# Altium PCB lesson10.PcbDoc
Units mil, origin at the board's own origin, x right, y up, seen from the top; angles counter-clockwise.
Board outline 4920 x 3340 mil, 2 copper layers (Top Layer, Bottom Layer); 11 components, 16 nets, 68 pads, 8 vias.
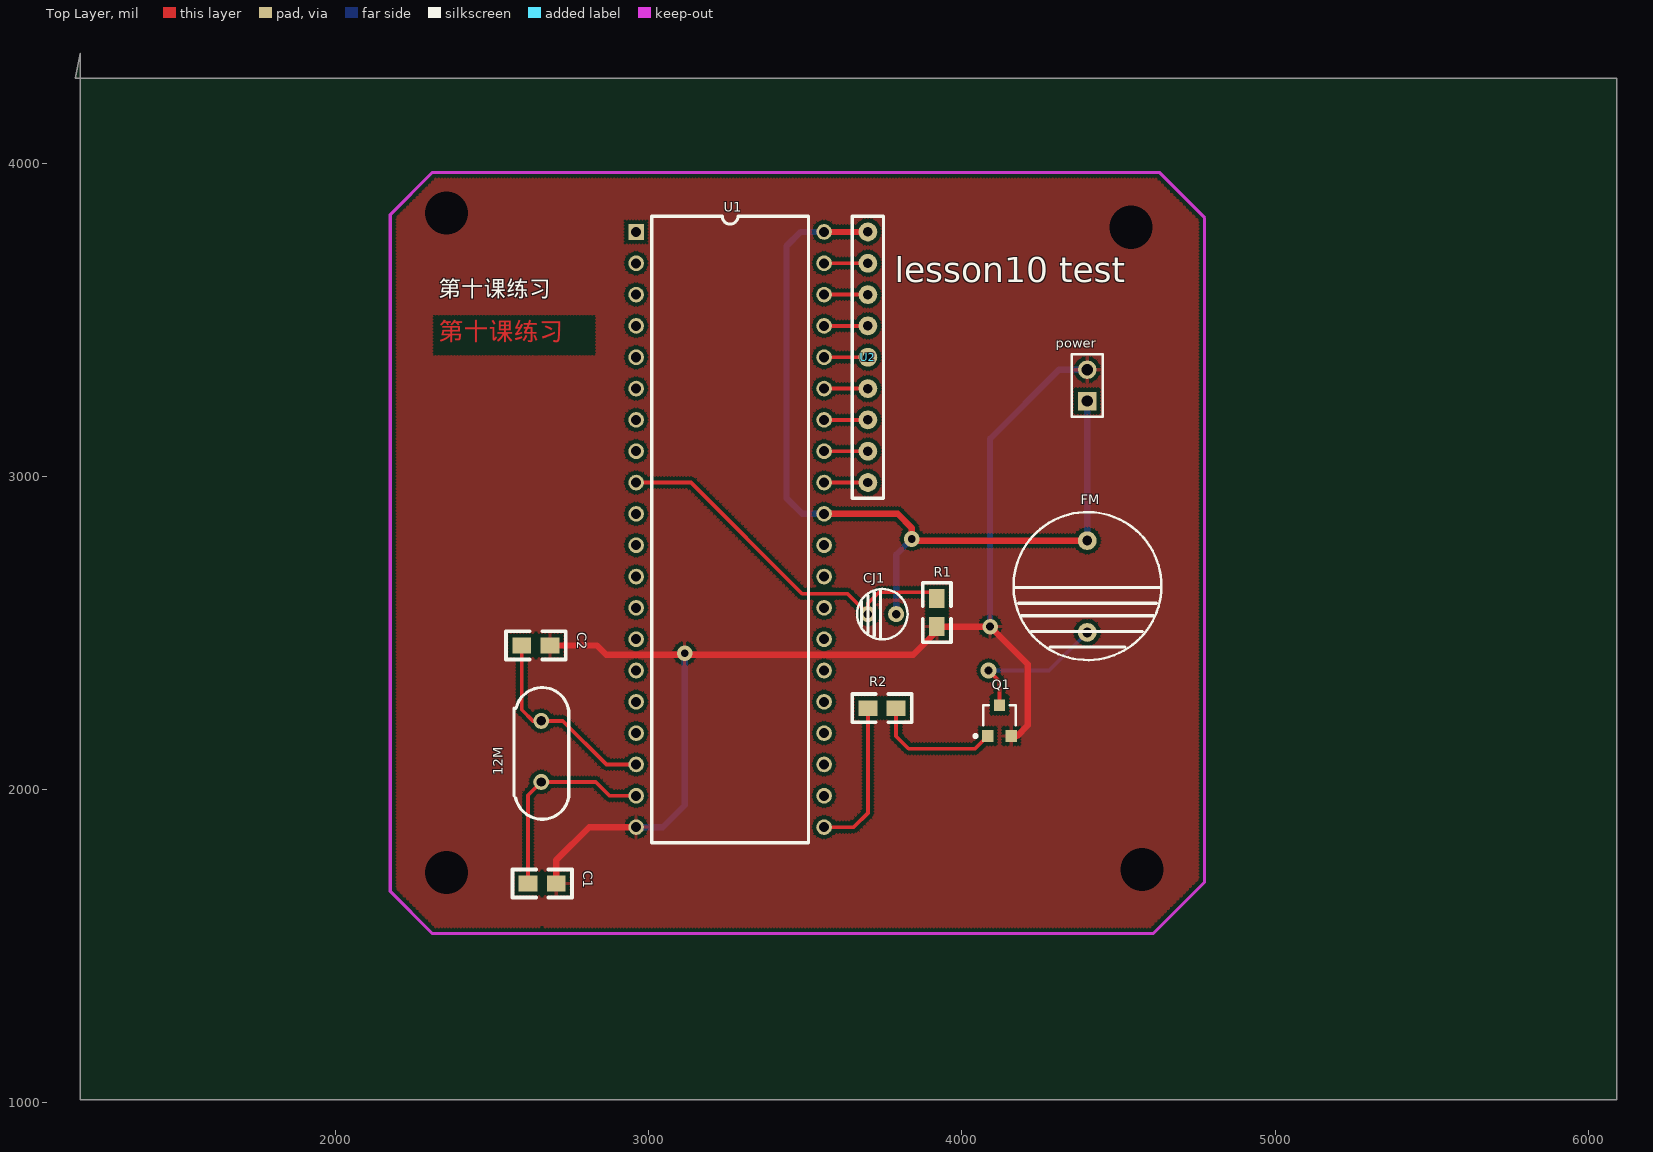
[diagram p0: Top Layer view]
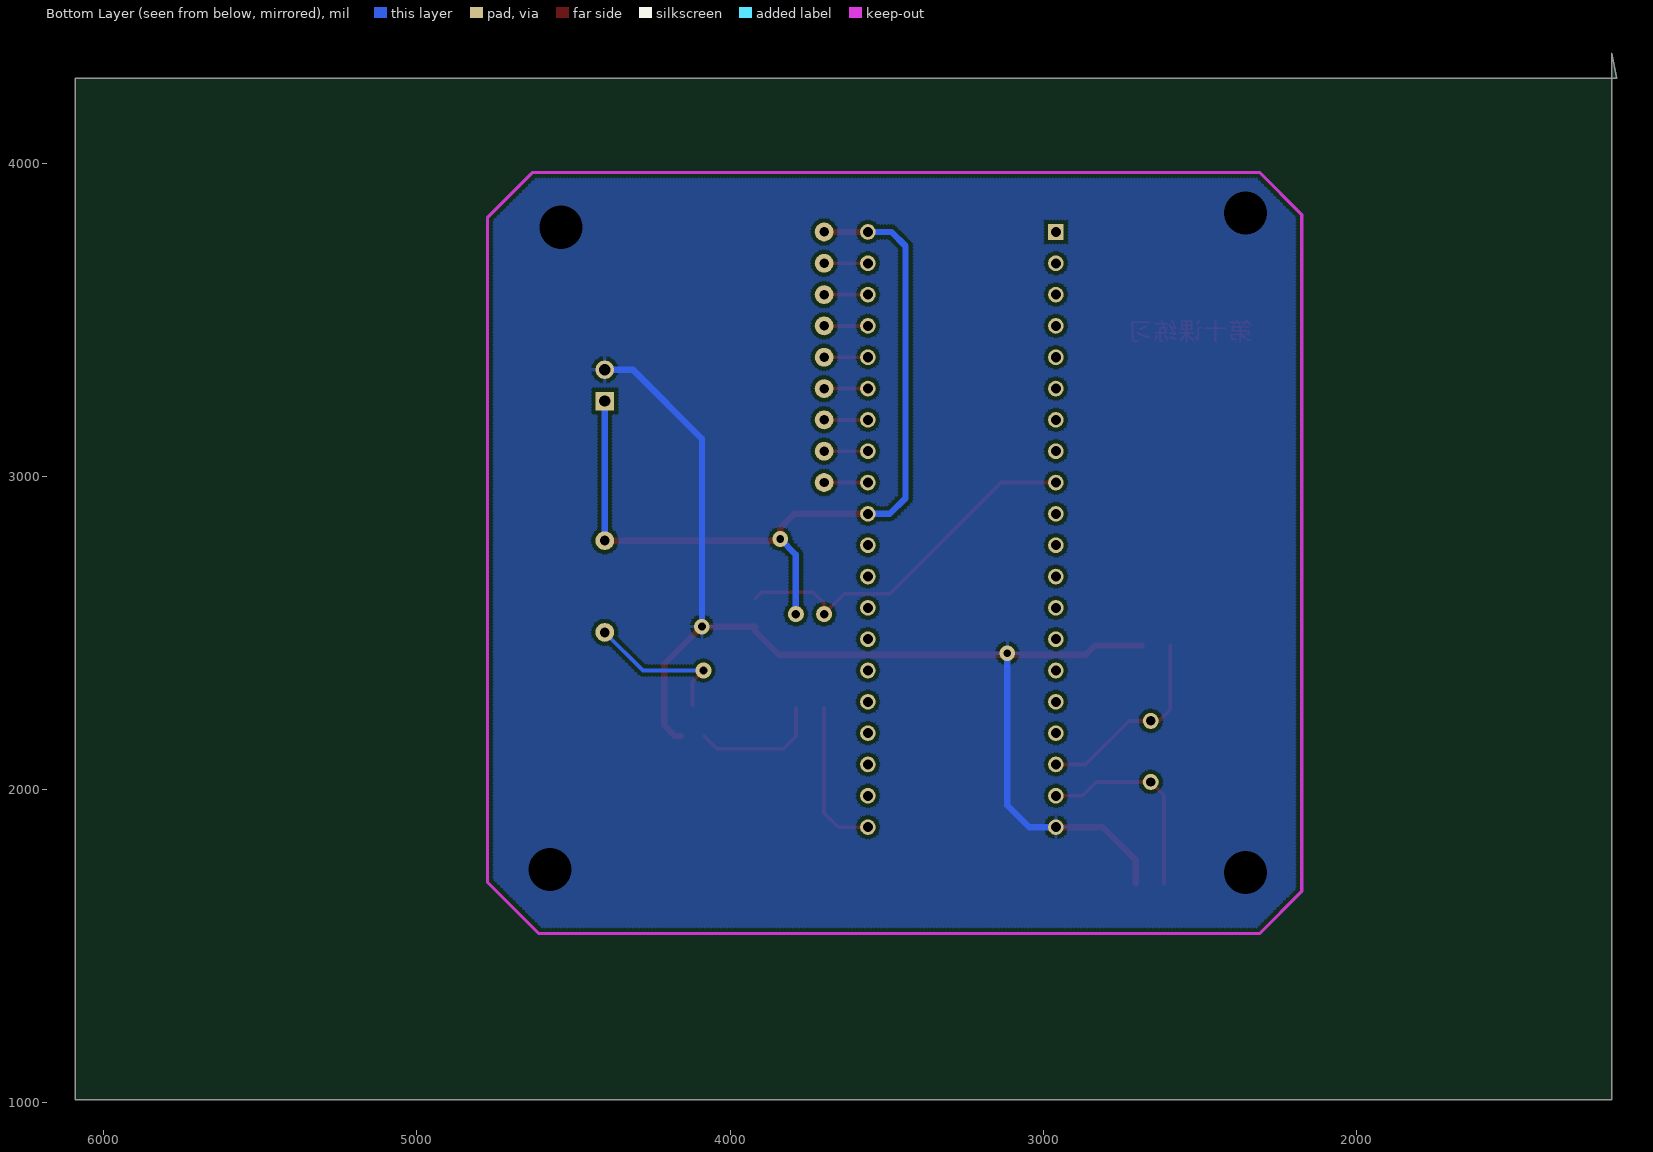
[diagram p1: Bottom Layer view, seen from below]

## Layer stack, top to bottom
Top Layer: signal copper 1.4
Dielectric: dielectric 12.6, FR-4, Dk 4.8
Bottom Layer: signal copper 1.4

## Board outline
1185,4350 1185,1010 6090,1010 6090,4270 1170,4270

## Design rules (kind name [scope] priority, off if disabled: settings)
Clearance [All] p1: gap=12
ComponentClearance [All] p1: gap=10 collisioncheckmode=3 verticalgap=10
PolygonConnect [All] p1: connectstyle=Relief reliefconductorwidth=10 reliefentries=4 polygonreliefangle="90 Angle"
RoutingVias [All] p1: holewidth=25 width=50 viastyle="Through Hole" minholewidth=25 minwidth=50 maxholewidth=25 maxwidth=50
SolderMaskExpansion [All] p1: expansion=4
TestPointUsage [All] p1: valid=0 allowmultiple=FALSE
Testpoint [All] p1: side=15 testpointundercomponent=TRUE minsize=40 maxsize=100 preferedsize=60 minholesize=0 maxholesize=40 preferedholesize=32 testpointgrid=1 style=1023 order=0123456789
Width Width_gnd [InNet('GND')] p1: maxlimit=20 minlimit=20 preferedwidth=20
Width Width_vcc [InNet('VCC')] p2: maxlimit=20 minlimit=20 preferedwidth=20
Width [All] p3: maxlimit=12 minlimit=12 preferedwidth=12
18 further rules are at their usual default settings.

## Components (designator, comment, footprint, x,y, rotation, side; value= is the part's Value field where it differs from the comment)
12M "12MHZ" JZ 2655,2120 r270 top (schematic designator U3)
C1 "30P" 0805 2615,1700 r0 top
C2 "30P" 0805 2595,2460 r0 top
CJ1 "10UF" CD4 3740,2560 r0 top
FM "BUZZER" LB2 4400,2700 r0 top
power "P2" HDR1X2 4400,3240 r90 top
Q1 "PNP" SOT-23 4120,2220 r0 top
R1 "1K" 0805 3920,2520 r90 top
R2 "1K" 0805 3700,2260 r0 top
U1 "87C51" DIP40 2960,3780 r0 top
U2 "SHANGLA" SHANGLA 3700,3780 r270 top

## Footprints (in the part's own frame and the unit in brackets; to place one, negate y for a bottom-side part, rotate by r counter-clockwise, add the part's x,y. Pads: shape width x height; smd on the part's side, far side on the other; paste and mask are expansions set on the pad)
0805 [mil]
  rect 60x50 smd: 1(0,0) 2(90,0)
  silkscreen extent -50,-45 140,45
CD4 [mm]
  round 1.3 hole 0.7: 1(1.27,0) 2(-1.016,0)
  silkscreen extent -1.89,-2.04 2.19,2.04
DIP40 [mil]
  rect 50x50 hole 32: 1(0,0)
  round 50 hole 32: 2(0,-100) 3(0,-200) 4(0,-300) 5(0,-400) 6(0,-500) 7(0,-600) 8(0,-700) 9(0,-800) 10(0,-900) 11(0,-1000) 12(0,-1100) 13(0,-1200) 14(0,-1300) 15(0,-1400) 16(0,-1500) 17(0,-1600) 18(0,-1700) 19(0,-1800) 20(0,-1900) 21(600,-1900) 22(600,-1800) 23(600,-1700) 24(600,-1600) 25(600,-1500) 26(600,-1400) 27(600,-1300) 28(600,-1200) 29(600,-1100) 30(600,-1000) 31(600,-900) 32(600,-800) 33(600,-700) 34(600,-600) 35(600,-500) 36(600,-400) 37(600,-300) 38(600,-200) 39(600,-100) 40(600,0)
  silkscreen extent 50,-1950 550,50
HDR1X2 [mm]
  rect 1.5x1.5 hole 0.9: 1(0,0)
  round 1.5 hole 0.9: 2(2.54,0)
  silkscreen extent -1.27,-1.27 3.81,1.27
JZ [mm]
  round 1.3 hole 0.762: 1(-2.517,0.055) 2(2.436,0.055)
  silkscreen extent -5.22,-2.16 5.46,2.31
LB2 [mil]
  round 60 hole 31.5: 1(0,94.49) 2(0,-198.42)
  silkscreen extent -235,-287 237,186
SHANGLA [mil]
  round 60 hole 30: 1(0,0) 2(100,0) 3(200,0) 4(300,0) 5(400,0) 6(500,0) 7(600,0) 8(700,0) 9(800,0)
  silkscreen extent -50,-50 850,50
SOT-23 [mm] "SOT-23; 3 Leads; Body 3.0 x 2.6 mm, inc. leads (LxW max)"
  rect 0.9x0.95 smd: 1(-0.95,-1.25) 2(0.95,-1.25) 3(0,1.25)
  silkscreen extent -2.07,-1.37 1.3,1.25

## Part data
12M: library part CRYSTAL, "Crystal"
C1 C2: library part CAP, "Capacitor"
CJ1: library part "CAPACITOR POL", "Capacitor"
FM: "Buzzer"
power: library part "HEADER 2"
Q1: "PNP Transistor"
R1 R2: library part RES2

## Via types
v1: diameter 50, hole 25, Top Layer to Bottom Layer, 4 vias
v2: diameter 30, hole 137.8, Top Layer to Bottom Layer, 4 vias

## Nets (pads, with @x,y where several pads share a name; then routed paths per layer and width w, separated by ;. In a path a pad name is that pad's centre, name@x,y a point inside that pad or via, vN(x,y) a via of type N, cw(c..) or ccw(c..) an arc to the next point about the centre after c; other vN are vias at no path point)
GND: C1.2 C2.2 power.2 Q1.2 R1.1 U1.20 | length 3938.6
  Top Layer w20: C2.2 2835,2460 2865,2430 3845,2430 3920,2505 R1.1 v1(4090,2520) 4210,2400 4210,2205 4175.79,2170.79 Q1.2 ; C1.2 2705,1775 2810,1880 U1.20
  Bottom Layer w20: U1.20 3045,1880 3115,1950 v1(3115,2435) ; v1(4090,2520) 4090,3120 4310,3340 power.2
NetC1_1: 12M.2 C1.1 U1.19 | length 662.7
  Top Layer w12: C1.1 2615,1981.93 12M.2 2830.91,2024.09 2875,1980 U1.19
NetC2_1: 12M.1 C2.1 U1.18 | length 642.5
  Top Layer w12: C2.1 2595,2255 2630.9,2219.1 2725.9,2219.1 2865,2080 U1.18
NetCJ1_2: CJ1.2 R1.2 U1.9 | length 1191.8
  Top Layer w12: U1.9 3135,2980 3490,2625 3635,2625 CJ1.2 3700,2595 3735,2630 3900,2630 R1.2
NetFM_2: FM.2 Q1.3 | length 490.6
  Top Layer w12: v1(4085,2380) 4120,2345 Q1.3
  Bottom Layer w12: v1(4085,2380) 4278.42,2380 FM.2
NetQ1_1: Q1.1 R2.2 | length 416.1
  Top Layer w12: R2.2 3790,2170 3830,2130 4041.81,2130 Q1.1
NetR2_1: R2.1 U1.21 | length 493.6
  Top Layer w12: U1.21 3655,1880 3700,1925 R2.1
NetU1_32: U1.32 U2.9 | length 140
  Top Layer w12: U1.32 U2.9
NetU1_33: U1.33 U2.8 | length 140
  Top Layer w12: U1.33 U2.8
NetU1_34: U1.34 U2.7 | length 140
  Top Layer w12: U1.34 U2.7
NetU1_35: U1.35 U2.6 | length 140
  Top Layer w12: U1.35 U2.6
NetU1_36: U1.36 U2.5 | length 140
  Top Layer w12: U1.36 U2.5
NetU1_37: U1.37 U2.4 | length 140
  Top Layer w12: U1.37 U2.4
NetU1_38: U1.38 U2.3 | length 140
  Top Layer w12: U1.38 U2.3
NetU1_39: U1.39 U2.2 | length 140
  Top Layer w12: U1.39 U2.2
VCC: CJ1.1 FM.1 power.1 U1.31 U1.40 U2.1 | length 2826.5
  Top Layer w20: U1.31 3795,2880 3840,2835 v1(3840,2800) 3845.51,2794.49 FM.1 ; U1.40 U2.1
  Bottom Layer w20: U1.31 3490,2880 3440,2930 3440,3735 3485,3780 U1.40 ; CJ1.1 3790,2750 v1(3840,2800) ; FM.1 power.1
pads on no net: U1.1 U1.2 U1.3 U1.4 U1.5 U1.6 U1.7 U1.8 U1.10 U1.11 U1.12 U1.13 U1.14 U1.15 U1.16 U1.17 U1.22 U1.23 U1.24 U1.25 U1.26 U1.27 U1.28 U1.29 U1.30
copper on no net:
  other v2: 2355,1735 4575,1745 4540,3795 2355,3840

## Polygon pours and split planes (outlines as drawn)
GND on Top Layer (hatched 90Degree grid 10 track 10, remove dead copper): 2070,3990 5115,3990 5115,1385 1930,1385 1930,3935 2055,3935 2055,3990
GND on Bottom Layer (hatched 90Degree grid 10 track 10, remove dead copper): 2050,4035 5060,4035 5060,1430 1890,1430 1890,3900 2035,4045

## Keep-outs
Keep-Out Layer:
  lines w10: 2175,1675 2175,3835 2310,3970 4630,3970 4775,3825 4775,1705 4610,1540 2310,1540 2175,1675

## Other copper
Top Layer:
  text "第十课练习" at 2330,3415 h100

## Silkscreen, mask and mechanical layers (free items; w line width, h text height)
Top Overlay:
  text "lesson10 test" at 3785,3620 h80
  text "第十课练习" at 2330,3555 h90